# EAGLE board esp-12f_adapter (EAGLE 6.1)
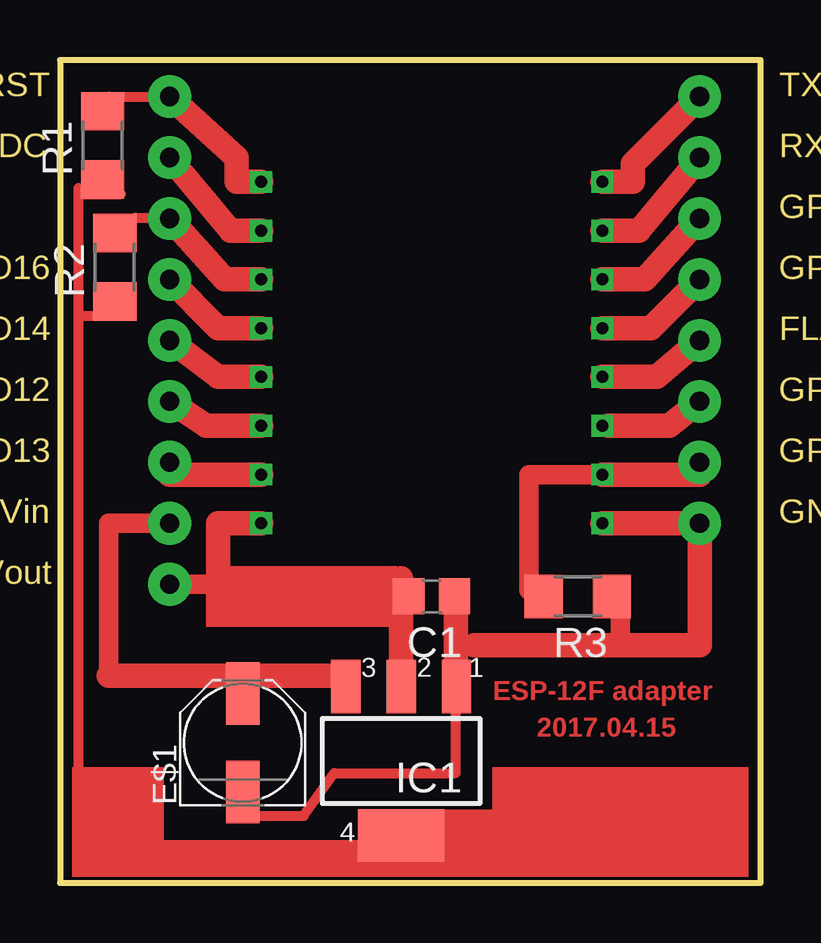
[diagram p0: board, top side]

Size 29.21 x 34.29 mm. Coordinates in mm from the lower left corner, seen from the top.
Outline: 0,0 29.21,0 29.21,34.29 0,34.29 0,0
Copper layers (1*16): Top 0.035mm / dielectric 1.5mm / Bottom 0.035mm
Design rules: minimum track width 10mil, minimum drill 24mil, track to track 8mil, track to pad 8mil, pad to pad 8mil, via to via 8mil, smd to smd 8mil, copper to edge 40mil, drill to drill 8mil, minimum pad ring 10mil, minimum via ring 8mil, stop-mask expansion 4mil, vias tented up to drill 0mil, thermal gap 10mil

## Footprints (pad centres in the part's own frame; a part is rotated, then mirrored left to right if it is on the bottom)
C0805 = smd 1.3 x 1.5: 1 -0.95,0; 2 0.95,0
PANASONIC_C = smd 2.6 x 1.4: + 2.05,0; - -2.05,0
SOT223 = smd 1.219 x 2.235: 1 -2.311,-3.099; 2 0,-3.099; 3 2.311,-3.099 | smd 3.6 x 2.2: 4 0,3.099
R1206 = smd 1.6 x 1.803: 1 -1.422,0; 2 1.422,0

## Placement (x,y rotation side)
C1  [C0805]  15.49,11.94 180 top
E$1  [PANASONIC_C]  7.62,5.84 90 top
IC1  LD1117  [SOT223]  14.22,5.08 180 top
R1  5K  [R1206]  1.78,30.73 90 top
R2  5K  [R1206]  2.29,25.65 90 top
R3  5K  [R1206]  21.59,11.94 180 top

## Library data of the parts
C1 E$1 R1-R3 = rcl
IC1 = linear

## Tracks (layer width: path | path; a pad name or v marks a point on that pad's centre or on a via)
S$1  (via drill 0.8 pad 1.78)
  Top 1.016: 22.86,19.05 25.4,19.05 v26.67,20.07
S$2  (via drill 0.8 pad 1.78)
  Top 1.016: 22.61,25.15 24.38,25.15 v26.67,27.69
S$3  (via drill 0.5 pad 0.25, 0.8 pad 1.78)
  Top 1.016: v22.61,29.21 23.88,29.21 23.88,29.97 v26.67,32.77
S$4  (via drill 0.8 pad 1.78)
  Top 1.016: 8.38,27.18 7.11,27.18 v4.57,30.23
S$5  (via drill 0.5 pad 0.25)
  Top 1.016: v8.38,14.99 6.6,14.99 6.6,12.7
S$6  (via drill 0.5 pad 0.25)
  other vias: 8.38,29.21
S$7  (via drill 0.8 pad 1.78)
  Top 0.406: 2.03,32.77 v4.57,32.77
  Top 1.016: 8.38,29.21 7.37,29.21 7.37,30.23 v4.57,32.77
S$8
  Top 1.016: 14.22,9.14 14.22,12.7
S$9
  Top 0.406: 7.37,2.79 10.16,2.79 11.43,4.57 16.51,4.57 16.51,7.11
S$10  (via drill 0.5 pad 0.25, 0.8 pad 1.78)
  Top 0.813: 23.37,12.19 23.37,9.91
  Top 1.016: v22.61,14.99 v26.67,14.99 26.67,9.91 23.37,9.91 17.27,9.91
S$11  (via drill 0.5 pad 0.25, 0.8 pad 1.78)
  Top 0.406: v4.57,27.69 3.05,27.69
  Top 1.016: v8.38,25.15 6.86,25.15 v4.57,27.69
S$12  (via drill 0.5 pad 0.25)
  other vias: 8.38,27.18
S$13
  Top 1.016: 6.86,12.7 13.97,12.7
S$14
  Top 0.406: 0.76,28.96 0.76,28.7 | 0.76,28.7 0.76,23.62 | 0.76,23.62 0.76,3.81 | 2.54,23.62 0.76,23.62 | 0.76,28.7 2.54,28.7
S$15  (via drill 0.5 pad 0.25, 0.8 pad 1.78)
  Top 1.016: v4.57,25.15 6.6,23.11 v8.38,23.11
S$16
  Top 1.016: 16.51,12.19 16.51,7.62
S$17  (via drill 0.5 pad 0.25, 0.8 pad 1.78)
  Top 1.016: v4.57,22.61 6.6,21.08 v8.38,21.08
S$18  (via drill 0.5 pad 0.25, 0.8 pad 1.78)
  Top 1.016: v4.57,20.07 6.1,19.05 v8.38,19.05
S$19  (via drill 0.5 pad 0.25, 0.8 pad 1.78)
  Top 1.016: v4.57,17.53 4.57,17.02 v8.38,17.02
S$20  (via drill 0.5 pad 0.25, 0.8 pad 1.78)
  Top 0.813: v22.61,17.02 19.56,17.02 19.56,12.19
  Top 1.016: v26.67,17.53 26.67,17.02 v22.61,17.02
S$22  (via drill 0.8 pad 1.78)
  Top 0.813: v4.57,12.45 7.11,12.45
S$29  (via drill 0.5 pad 0.25)
  other vias: 22.61,19.05
S$30  (via drill 0.5 pad 0.25, 0.8 pad 1.78)
  Top 1.016: v22.61,21.08 24.89,21.08 v26.67,22.61
S$31  (via drill 0.5 pad 0.25, 0.8 pad 1.78)
  Top 1.016: v22.61,23.11 24.64,23.11 v26.67,25.15
S$32  (via drill 0.5 pad 0.25)
  other vias: 22.61,25.15
S$33  (via drill 0.5 pad 0.25, 0.8 pad 1.78)
  Top 1.016: v22.61,27.18 24.13,27.18 v26.67,30.23
S$35  (via drill 0.8 pad 1.78)
  Top 0.813: 2.03,8.64 2.03,14.99 v4.57,14.99
  Top 1.016: 2.03,8.64 11.68,8.64
(copper drawn outside any net)
  shapes: Top area x5

## Text on the board
Top: ESP-12F adapter | 2017.04.15
Dimension: RST | TXD | ADC | RXD | GPIO05 | GPIO16 | GPIO04 | GPIO14 | FLASH | GPIO12 | GPIO02 | GPIO13 | GPIO15 | +4.5-6Vin | GND | +3.3Vout